# EAGLE board Daring Maimu-Leelo (EAGLE 9.7.0)

Size 241.26 x 106.57 mm. Coordinates in mm from the lower left corner, seen from the top.
Outline: 0,0 241.26,0 241.26,106.57 0,106.57 0,0
Copper layers (1*16): Top 0.035mm / dielectric 1.5mm / Bottom 0.035mm
Design rules "default": minimum track width 6mil, minimum drill 0.35mm, track to track 6mil, track to pad 6mil, pad to pad 6mil, via to via 6mil, smd to smd 6mil, copper to edge 40mil, drill to drill 6mil, minimum pad ring 10mil, minimum via ring 8mil, stop-mask expansion 4mil, vias tented up to drill 0mil, thermal gap 10mil

## Footprints (pad centres in the part's own frame; a part is rotated, then mirrored left to right if it is on the bottom)
LEDRD254W60D565H860B = drill 0.981 pad 1.581: 1 -1.27,0; 2 1.27,0
LEDRD254W60D565H860B_Y = drill 0.981 pad 1.581: 1 -1.27,0; 2 1.27,0
LEDRD254W60D565H860B_G = drill 0.981 pad 1.581: 1 -1.27,0; 2 1.27,0
LEDRD254W60D565H860B_W = drill 0.981 pad 1.581: 1 -1.27,0; 2 1.27,0
7SEG-13 = drill 0.813 long: 1 -5.08,-7.62; 2 -2.54,-7.62; 3 0,-7.62; 4 2.54,-7.62; 5 5.08,-7.62; 6 5.08,7.62; 7 2.54,7.62; 8 0,7.62; 9 -2.54,7.62; 10 -5.08,7.62
HC-SR04 = drill 1.016 long: 1 -3.81,0; 2 -1.27,0; 3 1.27,0; 4 3.81,0
RESAD1016W63L850D250B = drill 0.83 pad 1.43: 1 -5.08,0; 2 5.08,0
GL5528 = drill 0.8 pad 1.4: 1 -1.702,0; 2 1.702,0
SWITCH-MOMENTARY-PTH-6.5MM = drill 1.016 pad 1.88: 1 -3.251,2.261; 2 3.251,2.261; 3 -3.251,-2.261; 4 3.251,-2.261
ARDUINO-UNO-R3-SHIELD = drill 1.016 pad 1.88: 3.3V 24.13,-2.54; 5V 24.13,0; A0 24.13,12.7; A1 24.13,15.24; A2 24.13,17.78; A3 24.13,20.32; A4 24.13,22.86; A5 24.13,25.4; AREF -24.13,-13.97; D2 -24.13,20.32; D3 -24.13,17.78; D4 -24.13,15.24; D5 -24.13,12.7; D6 -24.13,10.16; D7 -24.13,7.62; D8 -24.13,3.81; D9 -24.13,1.27; D10 -24.13,-1.27; D11 -24.13,-3.81; D12 -24.13,-6.35; D13 -24.13,-8.89; GND@0 24.13,2.54; GND@1 24.13,5.08; GND@2 -24.13,-11.43; IOREF 24.13,-7.62; NC 24.13,-10.16; RES 24.13,-5.08; RX -24.13,25.4; SCL -24.13,-19.05; SDA -24.13,-16.51; TX -24.13,22.86; VIN 24.13,7.62
DIP762W53P254L1969H508Q16B = drill 0.743 pad 1.343: 1 -3.81,8.89; 2 -3.81,6.35; 3 -3.81,3.81; 4 -3.81,1.27; 5 -3.81,-1.27; 6 -3.81,-3.81; 7 -3.81,-6.35; 8 -3.81,-8.89; 9 3.81,-8.89; 10 3.81,-6.35; 11 3.81,-3.81; 12 3.81,-1.27; 13 3.81,1.27; 14 3.81,3.81; 15 3.81,6.35; 16 3.81,8.89

## Placement (x,y rotation side)
D1  RED  [LEDRD254W60D565H860B]  87.99,39.07 180 top
D2  YELLOW  [LEDRD254W60D565H860B_Y]  95.61,39.07 180 top
D3  GREEN  [LEDRD254W60D565H860B_G]  103.23,39.07 180 top
D4  WHITE  [LEDRD254W60D565H860B_W]  156.57,59.39 180 top
DIGIT2  7SEG-CA  [7SEG-13]  231.99,52.02 0 top
DIST1  DISTANCE-SENSOR-4PINHC-SR04  [HC-SR04]  148.95,67.01 0 top
R1  1k  [RESAD1016W63L850D250B]  96.88,51.77 90 top
R2  1k  [RESAD1016W63L850D250B]  117.2,46.69 0 top
R3  PHOTOCELL_GL5528  [GL5528]  136.25,46.69 0 top
R4  1k  [RESAD1016W63L850D250B]  89.26,51.77 90 top
R5  1k  [RESAD1016W63L850D250B]  104.5,51.77 90 top
R6  1k  [RESAD1016W63L850D250B]  129.9,41.61 0 top
R7  1k  [RESAD1016W63L850D250B]  157.84,51.77 90 top
R8  1k  [RESAD1016W63L850D250B]  224.37,52.02 90 top
R9  1k  [RESAD1016W63L850D250B]  219.29,52.02 90 top
R10  1k  [RESAD1016W63L850D250B]  214.21,52.02 90 top
R11  1k  [RESAD1016W63L850D250B]  220.58,84.6 180 top
R12  1k  [RESAD1016W63L850D250B]  220.42,89.97 0 top
R13  1k  [RESAD1016W63L850D250B]  220.26,95.19 0 top
R14  1k  [RESAD1016W63L850D250B]  220.26,100.24 180 top
R17  1k  [RESAD1016W63L850D250B]  193.49,18.52 0 top
R18  1k  [RESAD1016W63L850D250B]  194.68,12.87 0 top
R19  1k  [RESAD1016W63L850D250B]  190.52,9.15 0 top
R20  1k  [RESAD1016W63L850D250B]  190.81,6.33 0 top
S1  SWITCH_MOMENTARY  [SWITCH-MOMENTARY-PTH-6.5MM]  109.58,53.04 90 top
S2  SWITCH_MOMENTARY  [SWITCH-MOMENTARY-PTH-6.5MM]  124.82,53.04 90 top
U1  ARDUINO-UNO-R3-SHIELD  [ARDUINO-UNO-R3-SHIELD]  47.88,68.97 270 top
U2  CD4511_PDIP  [DIP762W53P254L1969H508Q16B]  182.46,53.29 90 top

## Library data of the parts
D1 = Tinkercad; CATEGORY: Opto-Electronic; SUB-CATEGORY: LED; VALUE: LED_RED
D2 = Tinkercad; CATEGORY: Opto-Electronic; SUB-CATEGORY: LED; VALUE: LED_YELLOW
D3 = Tinkercad; CATEGORY: Opto-Electronic; SUB-CATEGORY: LED; VALUE: LED_GREEN
D4 = Tinkercad; CATEGORY: Opto-Electronic; SUB-CATEGORY: LED; VALUE: LED_WHITE
DIGIT2 = Tinkercad; CATEGORY: Opto-Electronic; SUB-CATEGORY: Display; TYPE: 7-Segment
DIST1 R1-R14 R17-R20 S1 S2 U1 U2 = Tinkercad

## Nets
D1_A: D1.1 R4.1
D2_A: D2.1 R1.1
D3_A: D3.1 R5.1
D4_A: D4.1 R7.2
DIGIT2_A: DIGIT2.7 R13.2
DIGIT2_B: DIGIT2.6 R14.1
DIGIT2_C: DIGIT2.4 R10.1
DIGIT2_D: DIGIT2.2 R9.1
DIGIT2_E: DIGIT2.1 R8.1
DIGIT2_F: DIGIT2.9 R12.2
DIGIT2_G: DIGIT2.10 R11.1
U1_5V: DIST1.1 R2.2 R6.1 S2.1 S2.2 U1.5V
U1_A0: R3.1 R6.2 U1.A0
U1_D2: R2.1 S1.3 S1.4 U1.D2
U1_D3: DIST1.2 U1.D3
U1_D4: DIST1.3 U1.D4
U1_D5: D1.2 D2.2 D3.2 D4.2 DIST1.4 R3.2 S1.1 S1.2 S2.3 S2.4 U1.D5 U1.GND@0 U1.GND@1 U1.GND@2 U2.8
U1_D6: R4.2 U1.D6
U1_D7: R1.2 U1.D7
U1_D8: R5.2 U1.D8
U1_D9: R17.2 U1.D9
U1_D10: R18.2 U1.D10
U1_D11: R7.1 U1.D11
U1_D12: R19.2 U1.D12
U1_D13: R20.2 U1.D13
U2_A: R13.1 U2.13
U2_B: R14.2 U2.12
U2_C: R10.2 U2.11
U2_D: R9.2 U2.10
U2_E: R8.2 U2.9
U2_F: R11.2 U2.15
U2_G: R12.1 U2.14
U2_IA: R17.1 U2.7
U2_IB: R20.1 U2.1
U2_IC: R19.1 U2.2
U2_ID: R18.1 U2.6

## Tracks (layer width: path | path; a pad name or v marks a point on that pad's centre or on a via)
D1_A  (1 unrouted)
D2_A  (1 unrouted)
D3_A  (1 unrouted)
D4_A  (1 unrouted)
DIGIT2_A  (1 unrouted)
DIGIT2_B  (1 unrouted)
DIGIT2_C  (1 unrouted)
DIGIT2_D  (1 unrouted)
DIGIT2_E  (1 unrouted)
DIGIT2_F  (1 unrouted)
DIGIT2_G  (1 unrouted)
U1_5V  (5 unrouted)
U1_A0  (2 unrouted)
U1_D2  (3 unrouted)
U1_D3  (1 unrouted)
U1_D4  (1 unrouted)
U1_D5  (14 unrouted)
U1_D6  (1 unrouted)
U1_D7  (1 unrouted)
U1_D8  (1 unrouted)
U1_D9  (1 unrouted)
U1_D10  (1 unrouted)
U1_D11  (1 unrouted)
U1_D12  (1 unrouted)
U1_D13  (1 unrouted)
U2_A  (1 unrouted)
U2_B  (1 unrouted)
U2_C  (1 unrouted)
U2_D  (1 unrouted)
U2_E  (1 unrouted)
U2_F  (1 unrouted)
U2_G  (1 unrouted)
U2_IA  (1 unrouted)
U2_IB  (1 unrouted)
U2_IC  (1 unrouted)
U2_ID  (1 unrouted)